# EAGLE board procesor (EAGLE 9.7.0)
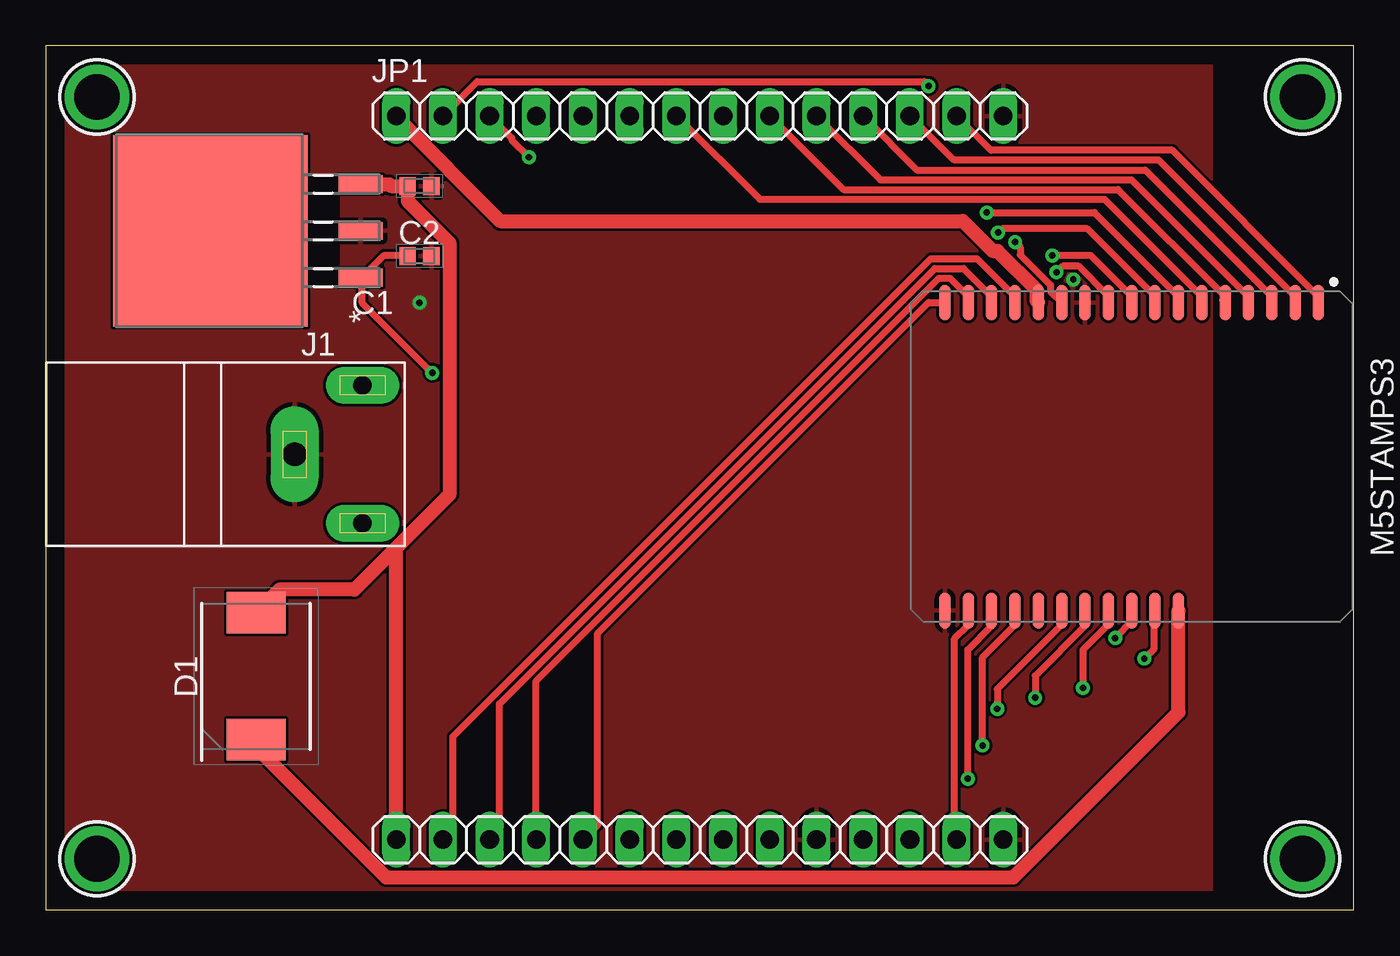
[diagram p0: board, top side]
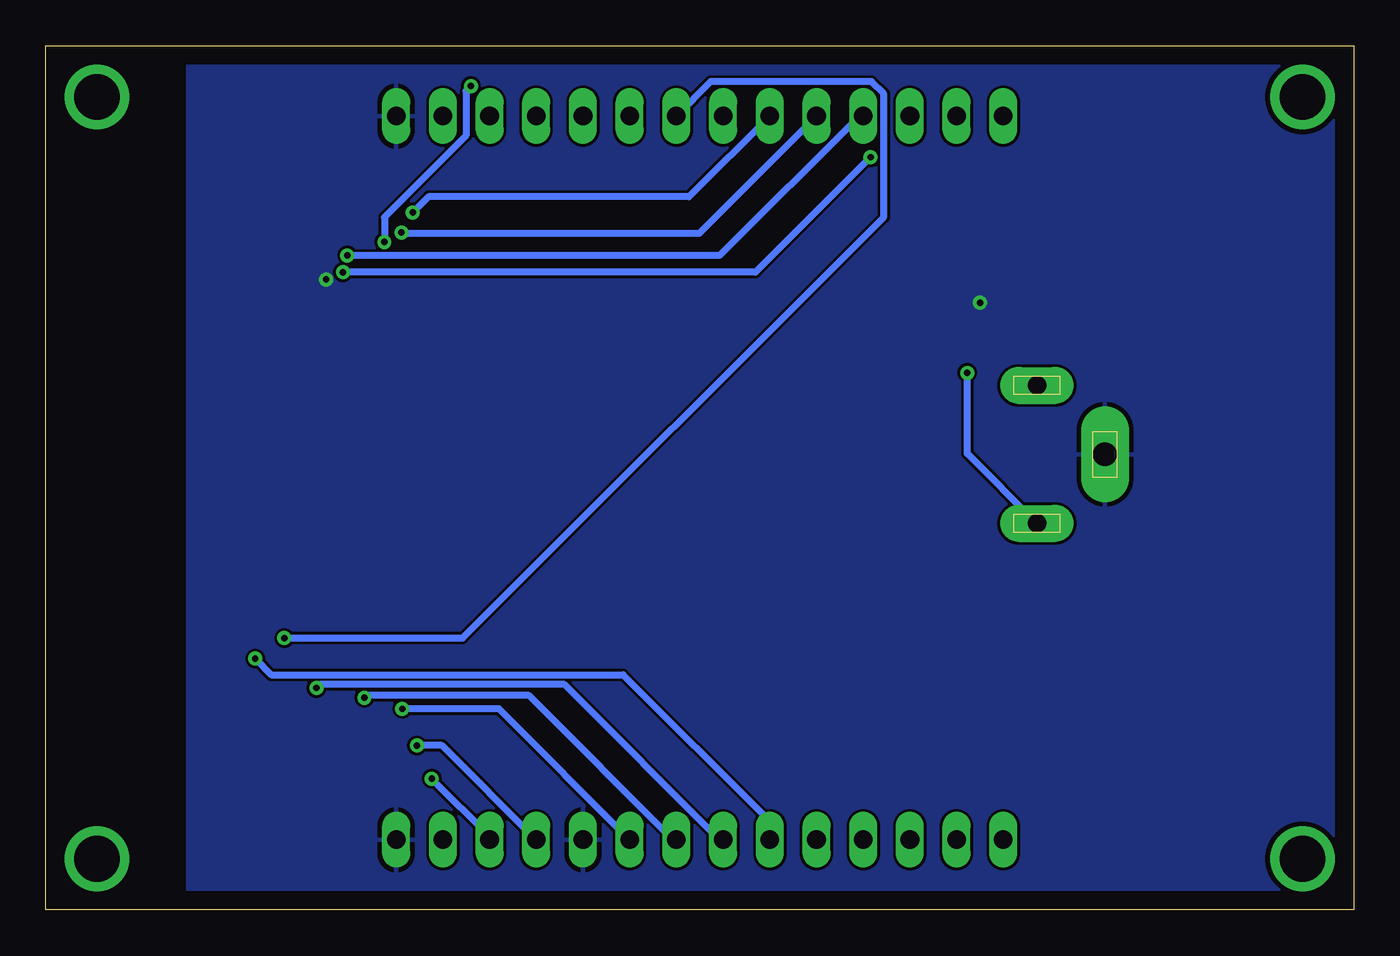
[diagram p1: board, bottom side, seen from below]

Size 71.12 x 46.99 mm. Coordinates in mm from the lower left corner, seen from the top.
Outline: 0,0 71.12,0 71.12,46.99 0,46.99 0,0
Copper layers (1*16): Top 0.035mm / dielectric 1.5mm / Bottom 0.035mm
Design rules "default *": minimum track width 15mil, minimum drill 0.35mm, track to track 6mil, track to pad 6mil, pad to pad 6mil, via to via 6mil, smd to smd 6mil, copper to edge 40mil, drill to drill 6mil, minimum pad ring 10mil, minimum via ring 8mil, stop-mask expansion 4mil, vias tented up to drill 0mil, thermal gap 10mil
Net classes: 1 zasilanie: width 0.762 mm

## Footprints (pad centres in the part's own frame; a part is rotated, then mirrored left to right if it is on the bottom)
CAPC1608X100N = smd 0.89 x 0.98: 1 -0.65,0; 2 0.65,0
DIOM8059X256N = smd 2.25 x 3.2: 1 -3.45,0; 2 3.45,0
PJRAN1X1U01X = drill 1.3 pad 2.6 long: 1 0,0 | drill 1 pad 2 long: 2 3.75,3.7; 3 -3.75,3.7
1X14 = drill 1.016 long: 1 -16.51,0; 2 -13.97,0; 3 -11.43,0; 4 -8.89,0; 5 -6.35,0; 6 -3.81,0; 7 -1.27,0; 8 1.27,0; 9 3.81,0; 10 6.35,0; 11 8.89,0; 12 11.43,0; 13 13.97,0; 14 16.51,0
QFN127P2400X1800X470-36N = smd 1.957 x 0.637: 1 -8.38,10.16; 2 -8.38,8.89; 3 -8.38,7.62; 4 -8.38,6.35; 5 -8.38,5.08; 6 -8.38,3.81; 7 -8.38,2.54; 8 -8.38,1.27; 9 -8.38,0; 10 -8.38,-1.27; 11 -8.38,-2.54; 12 -8.38,-3.81; 13 -8.38,-5.08; 14 -8.38,-6.35; 15 -8.38,-7.62; 16 -8.38,-8.89; 17 -8.38,-10.16; 19 8.38,-10.16; 20 8.38,-8.89; 21 8.38,-7.62; 22 8.38,-6.35; 23 8.38,-5.08; 24 8.38,-3.81; 25 8.38,-2.54; 26 8.38,-1.27; 27 8.38,0; 28 8.38,1.27; 29 8.38,2.54
TS3B-L = smd 0.965 x 2.388: 1 -2.54,-8.23; 2 0,-8.23; 3 2.54,-8.23 | smd 10.414 x 10.566: 4 0,-0.051
MOUNTINGHOLE_2.5_PLATED = drill 2.5 pad 3.2: P$1 0,0

## Placement (x,y rotation side)
C1  C0603X104K1RACTU  [CAPC1608X100N]  20.32,35.56 180 top
C2  C0603X104K1RACTU  [CAPC1608X100N]  20.32,39.37 180 top
D1  SS34  [DIOM8059X256N]  11.43,12.7 90 top
J1  PJRAN1X1U01X  [PJRAN1X1U01X]  13.52,24.78 270 top
JP1  PINHD-1X14_1X14M  [1X14]  35.56,43.18 0 top
JP2  PINHD-1X14_1X14M  [1X14]  35.56,3.81 0 top
M5STAMPS3  DAC770A  [QFN127P2400X1800X470-36N]  59.05,24.65 270 top
U1  LM3940IS-3.3TS3B-L  [TS3B-L]  8.89,36.93 90 top
U$1  MOUNTINGHOLE2.5  [MOUNTINGHOLE_2.5_PLATED]  68.35,2.77 0 top
U$3  MOUNTINGHOLE2.5  [MOUNTINGHOLE_2.5_PLATED]  68.35,44.22 0 top
U$5  MOUNTINGHOLE2.5  [MOUNTINGHOLE_2.5_PLATED]  2.77,2.77 0 top
U$6  MOUNTINGHOLE2.5  [MOUNTINGHOLE_2.5_PLATED]  2.77,44.22 0 top

## Library data of the parts
C1 = C0603X104K1RACTU; DESCRIPTION: 0.47 uF; HEIGHT: 1mm; MANUFACTURER_NAME: KEMET; MANUFACTURER_PART_NUMBER: C0603X104K1RACTU; MOUSER_PART_NUMBER: 80-C0603X104K1RACTU; MOUSER_PRICE-STOCK: https://www.mouser.co.uk/ProductDetail/KEMET/C0603X104K1RACTU?qs=ZcfC38r4PovU2DcqPY0qJg%3D%3D
C2 = C0603X104K1RACTU; DESCRIPTION: 33 uF; HEIGHT: 1mm; MANUFACTURER_NAME: KEMET; MANUFACTURER_PART_NUMBER: C0603X104K1RACTU; MOUSER_PART_NUMBER: 80-C0603X104K1RACTU; MOUSER_PRICE-STOCK: https://www.mouser.co.uk/ProductDetail/KEMET/C0603X104K1RACTU?qs=ZcfC38r4PovU2DcqPY0qJg%3D%3D
D1 = SamacSys_Parts; DESCRIPTION: ON Semi SS34 SMT Schottky Diode, 40V 3A, 2-Pin DO-214AB; HEIGHT: 2.56mm; MANUFACTURER_NAME: onsemi; MANUFACTURER_PART_NUMBER: SS34; MOUSER_PART_NUMBER: 512-SS34; MOUSER_PRICE-STOCK: https://www.mouser.co.uk/ProductDetail/onsemi-Fairchild/SS34?qs=2ONuHmP%2FXzb3ub11UdFfdQ%3D%3D
J1 = Connector; CATEGORY: RCA Phono Connectors; DESCRIPTION: RCA Phono Connectors 1 POS R/A PHONO JACK; MANUFACTURER: Switchcraft Inc.; MPN: PJRAN1X1U01X; OPERATING_TEMPERATURE: -25°C ~ 85°C; PART_STATUS: Active; PITCH: -; ROHS_COMPLIANCE: ROHS3 Compliant; SERIES: PJR; SUBCATEGORY: Audio & Video Connectors; TYPE: Phono (RCA) Jack, Female, Through Hole, Right Angle
JP1 JP2 = Tinkercad
M5STAMPS3 = M5STAMPS3
U1 = 2024-06-25_11-20-03_Library; COPYRIGHT: Copyright (C) 2024 Ultra Librarian. All rights reserved.; MANUFACTURER_PART_NUMBER: LM3940IS-3.3; MFR_NAME: Texas Instruments; TYPE: LM3940IS-3.3
U$1 U$3 U$5 U$6 = microbuilder; BOM: EXCLUDE

## Nets
3V3 [zasilanie]: D1.1 M5STAMPS3.29
3V3_COMPONENTS [zasilanie]: C2.2 D1.2 JP2.1 U1.3
EN: M5STAMPS3.23
GND [zasilanie]: C1.1 C2.1 J1.1 JP1.14 JP2.10 JP2.14 M5STAMPS3.11 M5STAMPS3.19 U1.2
GPIO0: JP2.12 M5STAMPS3.21
GPIO1_EPAPER: JP1.13 M5STAMPS3.1
GPIO2_EPAPER: JP1.12 M5STAMPS3.2
GPIO3_EPAPER: JP1.11 M5STAMPS3.3
GPIO6: JP1.7 M5STAMPS3.6
GPIO7: JP1.6 M5STAMPS3.7
GPIO8: JP1.5 M5STAMPS3.8
GPIO9: JP1.4 M5STAMPS3.9
GPIO10: JP1.3 M5STAMPS3.10
GPIO11: JP1.2 M5STAMPS3.12
GPIO14: JP2.4 M5STAMPS3.16
GPIO15: JP2.5 M5STAMPS3.17
GPIO39: JP2.13 M5STAMPS3.20
GPIO40: JP2.11 M5STAMPS3.22
GPIO41: JP2.9 M5STAMPS3.24
GPIO42: JP2.7 M5STAMPS3.26
GPIO44: JP2.8 M5STAMPS3.25
GPIO46: JP2.6 M5STAMPS3.28
N$3: C1.2 J1.2 U1.1
SCL: JP2.3 M5STAMPS3.15
SDA: JP2.2 M5STAMPS3.14
SPI1_EPAPER: JP1.10 M5STAMPS3.4
SPI2_EPAPER: JP1.9 M5STAMPS3.5
SPI3_EPAPER: JP1.8 M5STAMPS3.27
VCC_5V [zasilanie]: JP1.1 M5STAMPS3.13

## Tracks (layer width: path | path; a pad name or v marks a point on that pad's centre or on a via)
3V3
  Top 0.762: D1.1 11.47,9.21 11.47,8.8 18.51,1.75 52.61,1.75 61.59,10.74 M5STAMPS3.29
3V3_COMPONENTS
  Top 0.762: D1.2 12.7,17.42 16.78,17.42 19.36,20 | 19.36,20 21.95,22.59 21.95,36.27 19.67,38.55 C2.2 18.77,39.37 18.67,39.47 U1.3 | JP2.1 19.05,19.69 19.36,20
GND  (via drill 0.35)
  other vias: 55.88,34.29 20.32,33.02
  pour Top: 0.08,0.08 63.42,0.08 63.42,46.91 0.08,46.91
  pour Bottom: 0.08,0.08 63.42,0.08 63.42,46.91 0.08,46.91
GPIO0  (via drill 0.35)
  Top 0.381: v50.14,7.13 50.14,14.13 51.44,15.43 M5STAMPS3.21
  Bottom 0.381: v50.14,7.13 46.94,3.93 46.94,3.87 JP2.12
GPIO1_EPAPER
  Top 0.381: M5STAMPS3.1 69.21,33.36 61.26,41.31 51.4,41.31 JP1.13
GPIO2_EPAPER
  Top 0.381: M5STAMPS3.2 67.88,33.1 67.88,33.42 60.52,40.78 49.39,40.78 JP1.12
GPIO3_EPAPER
  Top 0.381: M5STAMPS3.3 66.67,33.35 59.78,40.25 47.38,40.25 JP1.11
GPIO6
  Top 0.381: M5STAMPS3.6 62.81,33.09 62.81,33.41 57.57,38.65 38.82,38.65 JP1.7
GPIO7  (via drill 0.35)
  Top 0.381: M5STAMPS3.7 61.47,33.15 61.47,33.48 57.02,37.92 v51.17,37.92
  Bottom 0.381: JP1.6 36.15,38.78 50.31,38.78 v51.17,37.92
GPIO8  (via drill 0.35)
  Top 0.381: M5STAMPS3.8 60.27,33.08 60.27,33.41 56.63,37.05 51.99,37.05 v51.78,36.84 | v51.78,36.84
  Bottom 0.381: JP1.5 35.6,36.79 51.73,36.79 v51.78,36.84
GPIO9  (via drill 0.35)
  Top 0.381: M5STAMPS3.9 58.94,33.14 58.94,33.47 56.82,35.59 v54.73,35.59
  Bottom 0.381: JP1.4 26.89,43.18 34.48,35.59 v54.73,35.59
GPIO10  (via drill 0.35)
  Top 0.381: v26.27,40.94 25.34,41.87 25.34,41.97 JP1.3 | M5STAMPS3.10 57.74,33.07 57.74,33.45 56.18,35.01 55.3,35.01 v54.96,34.68
  Bottom 0.381: v26.27,40.94 32.53,34.68 v54.96,34.68
GPIO11  (via drill 0.35)
  Top 0.381: v48.01,44.81 47.77,45.05 23.46,45.05 JP1.2 | M5STAMPS3.12 54.64,33.64 54.64,33.99 53,35.62 53,36.04 v52.71,36.33
  Bottom 0.381: v48.01,44.81 48.27,44.54 48.27,42.11 52.71,37.67 v52.71,36.33
GPIO14
  Top 0.381: M5STAMPS3.16 50.14,33.05 50.14,33.38 49.17,34.35 48.57,34.35 26.67,12.45 JP2.4
GPIO15
  Top 0.381: M5STAMPS3.17 48,33.03 30,15.03 30,4.6 JP2.5
GPIO39
  Top 0.381: M5STAMPS3.20 50.14,16.24 50.14,15.47 49.42,14.75 49.42,3.92 JP2.13
GPIO40  (via drill 0.35)
  Top 0.381: v50.94,8.94 50.94,13.73 52.67,15.47 52.67,16.24 M5STAMPS3.22
  Bottom 0.381: JP2.11 49.58,8.94 v50.94,8.94
GPIO41  (via drill 0.35)
  Top 0.381: v51.74,10.93 51.74,12 55.21,15.47 55.21,16.27 M5STAMPS3.24
  Bottom 0.381: v51.74,10.93 46.49,10.93 JP2.9
GPIO42  (via drill 0.35)
  Top 0.381: M5STAMPS3.26 57.74,16.27 57.74,15.47 56.41,14.13 v56.41,12.07
  Bottom 0.381: JP2.7 34.4,3.73 42.93,12.26 56.22,12.26 v56.41,12.07
GPIO44  (via drill 0.35)
  Top 0.381: M5STAMPS3.25 56.54,16.27 56.54,15.47 53.8,12.73 v53.8,11.54
  Bottom 0.381: JP2.8 36.94,3.73 44.85,11.65 53.69,11.65 v53.8,11.54
GPIO46  (via drill 0.35)
  Top 0.381: v59.74,13.66 60.27,14.2 60.27,16.27 M5STAMPS3.28
  Bottom 0.381: JP2.6 31.87,3.87 31.87,4.93 39.73,12.79 58.87,12.79 v59.74,13.66
N$3  (via drill 0.35)
  Top 0.381: C1.2 19.6,35.6 18.4,35.6 17.2,34.4 U1.1 17.2,34.31 17.2,33.01 v21.01,29.2
  Bottom 0.381: J1.2 21.01,24.82 v21.01,29.2
SCL
  Top 0.381: M5STAMPS3.15 51.34,33.12 51.34,33.45 49.91,34.88 48.35,34.88 24.67,11.21 24.67,4.35 JP2.3
SDA
  Top 0.381: M5STAMPS3.14 52.67,33.06 52.67,33.39 50.64,35.42 48.12,35.42 22.14,9.43 22.14,4.36 JP2.2
SPI1_EPAPER
  Top 0.381: M5STAMPS3.4 65.34,33.09 65.34,33.42 59.05,39.71 45.38,39.71 JP1.10
SPI2_EPAPER
  Top 0.381: M5STAMPS3.5 64.01,33.16 64.01,33.48 58.31,39.18 43.37,39.18 JP1.9
SPI3_EPAPER  (via drill 0.35)
  Top 0.381: M5STAMPS3.27 59.07,16.27 59.07,15.7 v58.16,14.78
  Bottom 0.381: JP1.8 34.96,45.05 26.21,45.05 25.55,44.38 25.55,37.68 48.45,14.78 v58.16,14.78
VCC_5V
  Top 0.762: JP1.1 19.07,43.16 19.07,43.11 24.7,37.47 49.86,37.47 51.5,35.84 51.76,35.84 53.87,33.73 53.87,33.13 M5STAMPS3.13